# EAGLE board PCB_V1 (EAGLE 9.6.2)
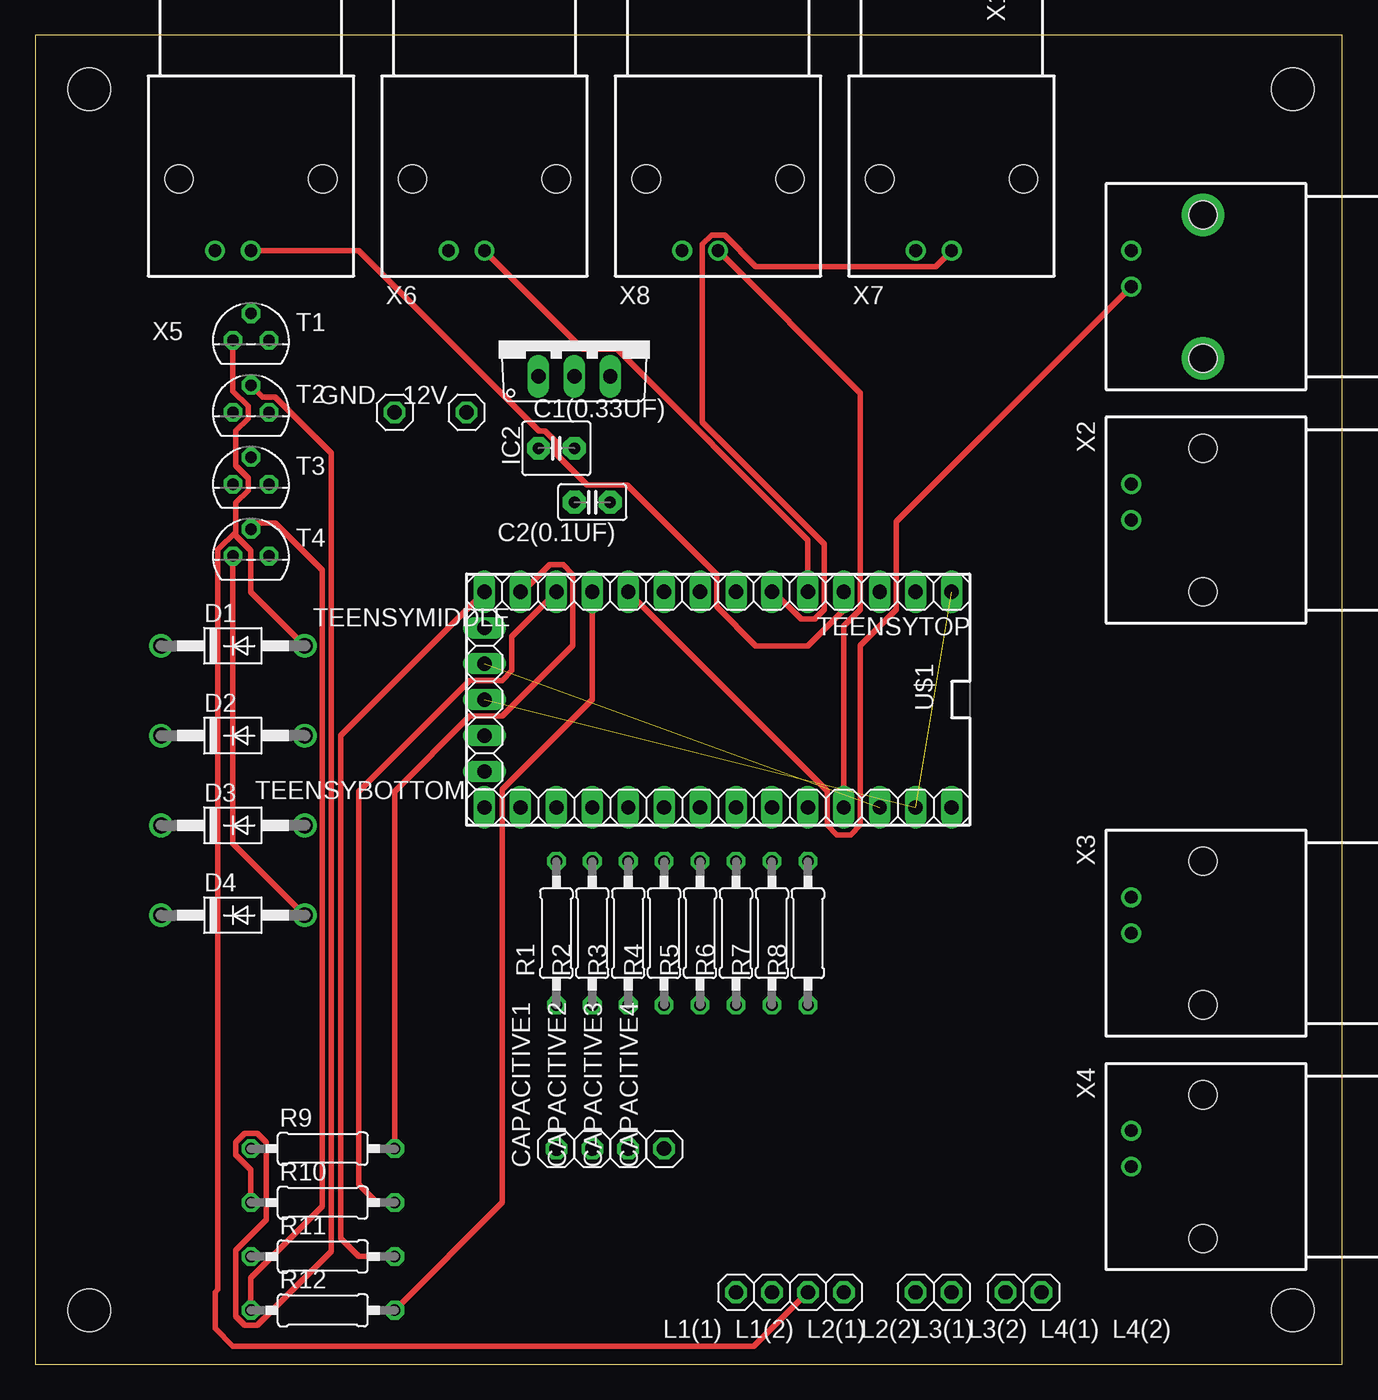
[diagram p0: board, top side]
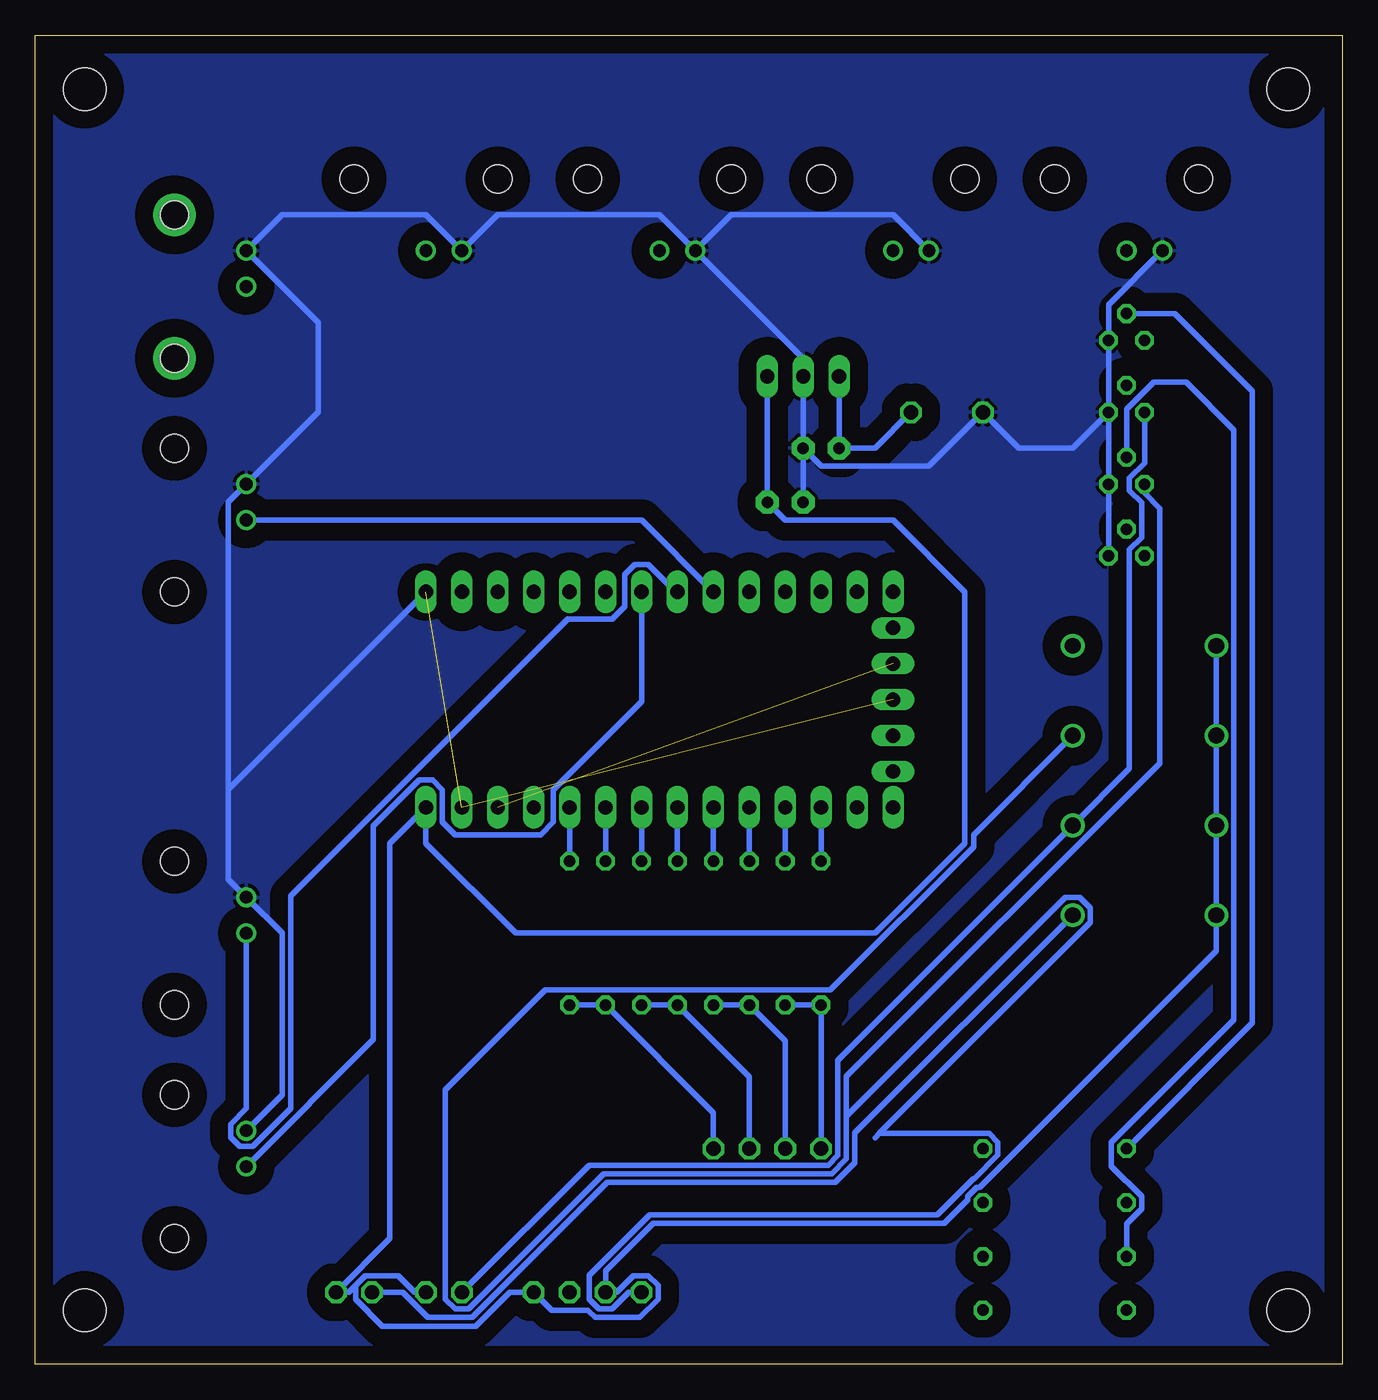
[diagram p1: board, bottom side, seen from below]

Size 92.38 x 93.97 mm. Coordinates in mm from the lower left corner, seen from the top.
Outline: 0,0 92.38,0 92.38,93.97 0,93.97 0,0
Copper layers (1*16): Top 0.035mm / dielectric 1.5mm / Bottom 0.035mm
Design rules "default": minimum track width 6mil, minimum drill 0.35mm, track to track 6mil, track to pad 6mil, pad to pad 6mil, via to via 6mil, smd to smd 6mil, copper to edge 40mil, drill to drill 6mil, minimum pad ring 10mil, minimum via ring 8mil, stop-mask expansion 4mil, vias tented up to drill 0mil, thermal gap 10mil
Net classes: 0 default: width 0.203 mm, drill 0.406 mm, clearance 0.203 mm
Holes 3 mm at 3.81,90.17 88.9,90.17 3.81,3.81 88.9,3.81

## Footprints (pad centres in the part's own frame; a part is rotated, then mirrored left to right if it is on the bottom)
1X01 = drill 1.016 octagon: 1 0,0
C2.5-4 = drill 0.813 pad 1.6 octagon: 1 -1.27,0; 2 1.27,0
C2.5-2 = drill 0.813 pad 1.6 octagon: 1 -1.27,0; 2 1.27,0
DO41-10 = drill 1.118: A 5.08,0; C -5.08,0
TO220V = drill 1.016 long: 1 -2.54,-2.54; 2 0,-2.54; 3 2.54,-2.54
0207/10 = drill 0.813 octagon: 1 -5.08,0; 2 5.08,0
TO92 = drill 0.813 octagon: 1 1.27,0; 2 0,1.905; 3 -1.27,0
1X14 = drill 1.016 long: 1 -16.51,0; 2 -13.97,0; 3 -11.43,0; 4 -8.89,0; 5 -6.35,0; 6 -3.81,0; 7 -1.27,0; 8 1.27,0; 9 3.81,0; 10 6.35,0; 11 8.89,0; 12 11.43,0; 13 13.97,0; 14 16.51,0
1X05 = drill 1.016 long: 1 -5.08,0; 2 -2.54,0; 3 0,0; 4 2.54,0; 5 5.08,0
TEENSY_3.0-3.2&LC_OUTER_ROW = drill 0.965: 0 -7.62,13.97; 1 -7.62,11.43; 2 -7.62,8.89; 3 -7.62,6.35; 3.3V 7.62,11.43; 3.3V1 -2.54,-16.51; 4 -7.62,3.81; 5 -7.62,1.27; 6 -7.62,-1.27; 7 -7.62,-3.81; 8 -7.62,-6.35; 9 -7.62,-8.89; 10 -7.62,-11.43; 11 -7.62,-13.97; 12 -7.62,-16.51; 13 7.62,-16.51; 14/A0 7.62,-13.97; 15/A1 7.62,-11.43; 16/A2 7.62,-8.89; 17/A3 7.62,-6.35; 18/A4 7.62,-3.81; 19/A5 7.62,-1.27; 20/A6 7.62,1.27; 21/A7 7.62,3.81; 22/A8 7.62,6.35; 23/A9 7.62,8.89; AGND 7.62,13.97; GND -7.62,16.51; GND1 0,-16.51; PGM 2.54,-16.51; RESET/DAC 5.08,-16.51; VBAT -5.08,-16.51; VIN 7.62,16.51
AMP_227161 = drill 0.9 pad 1.27: 1 0,-5.08; 2 -2.54,-5.08 | drill 2: P$1 -5.08,0; P$2 5.08,0 | hole 2: -5.08,0; 5.08,0
AMP_227161' = drill 0.9 pad 1.27: 1 0,-5.08; 2 -2.54,-5.08 | hole 2: -5.08,0; 5.08,0

## Placement (x,y rotation side)
12V  [1X01]  30.48,67.31 0 top
C1(0.33UF)  [C2.5-4]  36.83,64.77 0 top
C2(0.1UF)  [C2.5-2]  39.37,60.96 180 top
CAPACITIVE1  [1X01]  36.83,15.24 90 top
CAPACITIVE2  [1X01]  39.37,15.24 90 top
CAPACITIVE3  [1X01]  41.91,15.24 90 top
CAPACITIVE4  [1X01]  44.45,15.24 90 top
D1  1N4004  [DO41-10]  13.97,50.8 0 top
D2  1N4004  [DO41-10]  13.97,44.45 0 top
D3  1N4004  [DO41-10]  13.97,38.1 0 top
D4  1N4004  [DO41-10]  13.97,31.75 0 top
GND  [1X01]  25.4,67.31 0 top
IC2  786TV  [TO220V]  38.1,72.39 0 top
L1(1)  [1X01]  49.53,5.08 0 top
L1(2)  [1X01]  52.07,5.08 0 top
L2(1)  [1X01]  54.61,5.08 0 top
L2(2)  [1X01]  57.15,5.08 0 top
L3(1)  [1X01]  62.23,5.08 0 top
L3(2)  [1X01]  64.77,5.08 0 top
L4(1)  [1X01]  68.58,5.08 0 top
L4(2)  [1X01]  71.12,5.08 0 top
R1  [0207/10]  36.83,30.48 90 top
R2  [0207/10]  39.37,30.48 90 top
R3  [0207/10]  41.91,30.48 90 top
R4  [0207/10]  44.45,30.48 90 top
R5  [0207/10]  46.99,30.48 90 top
R6  [0207/10]  49.53,30.48 90 top
R7  [0207/10]  52.07,30.48 90 top
R8  [0207/10]  54.61,30.48 90 top
R9  [0207/10]  20.32,15.24 0 top
R10  [0207/10]  20.32,11.43 0 top
R11  [0207/10]  20.32,7.62 0 top
R12  [0207/10]  20.32,3.81 0 top
T1  BC337  [TO92]  15.24,72.39 0 top
T2  BC337  [TO92]  15.24,67.31 0 top
T3  BC337  [TO92]  15.24,62.23 0 top
T4  BC337  [TO92]  15.24,57.15 0 top
TEENSYBOTTOM  [1X14]  48.26,39.37 0 top
TEENSYMIDDLE  [1X05]  31.75,46.99 270 top
TEENSYTOP  [1X14]  48.26,54.61 180 top
U$1  TEENSY_LC_OUTER_ROW  [TEENSY_3.0-3.2&LC_OUTER_ROW]  48.26,46.99 270 top
X1  1-227161-0  [AMP_227161]  82.55,76.2 270 top
X2  1-227161-0  [AMP_227161']  82.55,59.69 270 top
X3  1-227161-0  [AMP_227161']  82.55,30.48 270 top
X4  1-227161-0  [AMP_227161']  82.55,13.97 270 top
X5  1-227161-0  [AMP_227161']  15.24,83.82 0 top
X6  1-227161-0  [AMP_227161']  31.75,83.82 0 top
X7  1-227161-0  [AMP_227161']  64.77,83.82 0 top
X8  1-227161-0  [AMP_227161']  48.26,83.82 0 top

## Library data of the parts
12V CAPACITIVE1-CAPACITIVE4 GND L1(1) L1(2) L2(1) L2(2) L3(1) L3(2) L4(1) L4(2) TEENSYBOTTOM TEENSYMIDDLE TEENSYTOP = pinhead
C1(0.33UF) C2(0.1UF) = capacitor-wima
D1-D4 = diode
IC2 = linear
R1-R12 = rcl; SPICEPREFIX: R
T1-T4 = transistor
U$1 = Teensy_3_and_LC_Series_Boards_v1.4
X1 = con-coax_xavi; MF: TYCO ELECTRONICS; MPN: 1-227161; OC_FARNELL: unknown; OC_NEWARK: 33B3200
X2-X8 = con-coax; MF: TYCO ELECTRONICS; MPN: 1-227161; OC_FARNELL: unknown; OC_NEWARK: 33B3200

## Nets
3.3V: U$1.3.3V U$1.3.3V1
5V: C2(0.1UF).1 D1.C D2.C D3.C D4.C IC2.3 L1(2).1 L2(2).1 L3(2).1 L4(2).1 TEENSYBOTTOM.14
26/A12/DAC: U$1.RESET/DAC
GND: U$1.AGND U$1.GND U$1.GND1
N$1: TEENSYTOP.10 X1.1
N$2: TEENSYTOP.4 X5.1
N$3: TEENSYTOP.9 X2.1
N$4: 12V.1 C1(0.33UF).1 IC2.1
N$5: TEENSYTOP.7 X4.1
N$6: TEENSYTOP.8 X3.1
N$7: R1.2 TEENSYBOTTOM.3
N$8: TEENSYTOP.5 X6.1
N$9: R2.2 TEENSYBOTTOM.4
N$10: TEENSYTOP.6 X7.1
N$11: R3.2 TEENSYBOTTOM.5
N$12: R11.2 TEENSYTOP.14
N$13: R4.2 TEENSYBOTTOM.6
N$16: R5.2 TEENSYBOTTOM.7
N$17: R6.2 TEENSYBOTTOM.8
N$18: R7.2 TEENSYBOTTOM.9
N$19: R8.2 TEENSYBOTTOM.10
N$20: CAPACITIVE1.1 R1.1 R2.1
N$21: CAPACITIVE2.1 R3.1 R4.1
N$22: CAPACITIVE3.1 R5.1 R6.1
N$23: CAPACITIVE4.1 R7.1 R8.1
N$24: R11.1 T3.2
N$25: D2.A L1(1).1 T3.3
N$26: TEENSYBOTTOM.11 X8.1
N$27: R9.2 TEENSYTOP.13
N$28: R9.1 T1.2
N$29: D1.A L2(1).1 T1.3
N$30: R10.2 TEENSYTOP.12
N$31: R10.1 T2.2
N$32: D3.A L3(1).1 T2.3
N$34: R12.1 T4.2
N$35: D4.A L4(1).1 T4.3
N$36: R12.2 TEENSYTOP.11
N$37: C1(0.33UF).2 C2(0.1UF).2 GND.1 IC2.2 T1.1 T2.1 T3.1 T4.1 TEENSYTOP.1 X1.2 X2.2 X3.2 X4.2 X5.2 X6.2 X7.2 X8.2
VIN: U$1.VIN

## Tracks (layer width: path | path; a pad name or v marks a point on that pad's centre or on a via)
3.3V  (1 unrouted)
5V
  Bottom 0.406: IC2.3 C2(0.1UF).1 39.37,59.69 31.75,59.69 26.67,54.61 26.67,36.83 33.02,30.48 58.42,30.48 64.77,36.83 TEENSYBOTTOM.14 67.31,36.83 67.31,8.89 L4(2).1 70.23,5.08 69.75,5.56 | D1.C D2.C D3.C D4.C 8.89,29.21 25.6,12.5 25.84,12.5 26.47,11.87 26.47,11.63 28.14,9.96 48.7,9.96 52.07,6.59 L1(2).1 51.28,5.08 50.11,6.25 49.05,6.25 48.36,5.56 48.36,4.6 49.66,3.3 52.81,3.3 53.31,3.81 55.88,3.81 L2(2).1 58.85,5.08 61.24,2.69 67.84,2.69 69.75,4.6 69.75,5.56 | 69.75,5.56 69.06,6.25 66.73,6.25 65.56,5.08 L3(2).1
GND  (2 unrouted)
N$1
  Top 0.406: X1.1 60.86,59.59 60.86,53.36 58.32,50.82 58.32,38.12 57.63,37.44 56.67,37.44 55.98,38.12 55.98,40.54 TEENSYTOP.10
N$2
  Top 0.406: X5.1 22.86,78.74 35.62,65.98 36.06,65.98 36.89,65.14 36.89,64.27 39,62.17 41.85,62.17 48.16,55.86 48.16,53.57 50.93,50.8 54.61,50.8 57.15,53.34 TEENSYTOP.4
N$3
  Bottom 0.406: X2.1 49.53,59.69 TEENSYTOP.9
N$4
  Bottom 0.406: 12V.1 33.02,64.77 C1(0.33UF).1 IC2.1
N$5
  Bottom 0.406: X4.1 68.48,22.96 68.48,38.08 65.25,41.3 64.29,41.3 63.6,40.62 63.6,38.33 62.71,37.44 56.67,37.44 55.78,38.33 55.78,40.62 49.53,46.86 TEENSYTOP.7
N$6
  Bottom 0.406: TEENSYTOP.8 47.12,54.61 49.05,56.54 50.01,56.54 50.7,55.86 50.7,53.57 51.59,52.68 54.74,52.68 74.32,33.1 74.32,18.09 77.01,15.4 77.93,15.4 78.58,16.05 78.58,16.97 77.47,18.08 X3.1
N$7
  Bottom 0.406: TEENSYBOTTOM.3 R1.2
N$8
  Top 0.406: X6.1 38.71,71.78 41.12,71.78 54.61,58.29 TEENSYTOP.5
N$9
  Bottom 0.406: TEENSYBOTTOM.4 R2.2
N$10
  Top 0.406: X7.1 63.66,77.63 50.94,77.63 48.72,79.85 47.8,79.85 47.15,79.2 47.15,66.62 55.78,57.99 55.78,53.36 55.09,52.68 54.13,52.68 52.2,54.61 TEENSYTOP.6
N$11
  Bottom 0.406: TEENSYBOTTOM.5 R3.2
N$12
  Top 0.406: TEENSYTOP.14 21.59,44.45 21.59,8.89 22.86,7.62 R11.2
N$13
  Bottom 0.406: TEENSYBOTTOM.6 R4.2
N$16
  Bottom 0.406: TEENSYBOTTOM.7 R5.2
N$17
  Bottom 0.406: TEENSYBOTTOM.8 R6.2
N$18
  Bottom 0.406: TEENSYBOTTOM.9 R7.2
N$19
  Bottom 0.406: TEENSYBOTTOM.10 R8.2
N$20
  Bottom 0.406: R2.1 R1.1 CAPACITIVE1.1
N$21
  Bottom 0.406: R4.1 R3.1 39.37,22.86 CAPACITIVE2.1
N$22
  Bottom 0.406: CAPACITIVE3.1 41.91,20.32 R5.1 R6.1
N$23
  Bottom 0.406: R8.1 R7.1 44.45,17.78 CAPACITIVE4.1
N$24
  Bottom 0.406: R11.1 15.24,9.92 14.17,10.99 14.17,11.87 16.31,14.01 16.31,15.68 7.64,24.34 7.64,63.5 7.64,63.76 7.64,66.06 11.03,69.45 13.33,69.45 15.24,67.55 T3.2
N$25
  Bottom 0.406: T3.3 13.97,61.58 12.9,60.52 12.9,42.49 35.05,20.34 35.05,17.51 | D2.A 26.06,37.44 26.06,36.58 36.17,26.47 56.32,26.47 63.4,19.39 63.4,4.6 62.71,3.91 61.75,3.91 52.2,13.46 36.09,13.46 35.05,14.5 35.05,17.51 | 32.73,16.31 17.8,31.23 17.8,32.27 18.53,32.99 19.57,32.99 35.05,17.51 | 33.02,16.02 32.73,16.31 | L1(1).1 50.42,5.08 51.59,3.91 52.55,3.91 53.24,4.6 53.24,6.28 48.95,10.57 28.63,10.57 26.09,13.11 26.02,13.11 24.33,14.8 24.33,15.68 24.96,16.31 32.73,16.31
N$26
  Top 0.406: TEENSYBOTTOM.11 57.15,52.2 58.32,53.36 58.32,68.68 X8.1
N$27
  Top 0.406: R9.2 25.4,40.51 30.71,45.82 33,45.82 38,50.82 38,55.86 37.31,56.54 36.35,56.54 34.42,54.61 TEENSYTOP.13
N$28
  Bottom 0.406: R9.1 6.35,24.13 6.35,68.82 11.83,74.3 T1.2
N$29
  Top 0.406: T1.3 13.97,68.82 15.04,67.75 15.04,66.87 14.17,66 14.17,63.53 15.04,62.67 15.04,61.79 14.17,60.92 14.17,58.84 | D1.A 15.24,54.61 15.24,57.55 14.17,58.61 14.17,58.84 | L2(1).1 50.8,1.27 13.97,1.27 12.7,2.54 12.7,5.08 12.9,5.28 12.9,57.59 14.16,58.85 14.17,58.84
N$30
  Top 0.406: TEENSYTOP.12 33.68,51.46 33.68,49.05 33,48.36 30.71,48.36 22.86,40.51 22.86,12.7 24.13,11.43 R10.2
N$31
  Top 0.406: R10.1 15.24,13.73 14.17,14.8 14.17,15.68 14.8,16.31 15.68,16.31 16.31,15.68 16.31,10.2 14.17,8.06 14.17,3.37 14.8,2.74 15.68,2.74 20.9,7.97 20.9,64.42 16.95,68.38 16.08,68.38 T2.2
N$32
  Bottom 0.406: T2.3 13.97,63.74 15.04,62.67 15.04,61.79 14.17,60.92 14.17,58.45 15.04,57.59 15.04,42.11 D3.A 35.66,21.49 35.66,14.76 36.35,14.07 53.24,14.07 L3(1).1
N$34
  Top 0.406: R12.1 15.24,6.11 20.29,11.17 20.29,56.14 16.95,59.49 15.67,59.49 T4.2
N$35
  Top 0.406: T4.3 13.97,36.83 D4.A
  Bottom 0.406: D4.A 34.44,16.36 34.44,14.25 35.84,12.85 51.94,12.85 61.49,3.3 64.64,3.3 66.42,5.08 L4(1).1
N$36
  Top 0.406: R12.2 33.02,11.43 33.02,40.64 39.37,46.99 TEENSYTOP.11
N$37
  Bottom 0.406: C1(0.33UF).2 IC2.2 38.1,71.12 X8.2 | C1(0.33UF).2 36.83,63.5 29.21,63.5 GND.1 22.86,64.77 19.05,64.77 T2.1 | C2(0.1UF).2 C1(0.33UF).2 | X4.2 74.93,19.05 74.93,30.48 X3.2 78.74,34.29 78.74,40.64 | T2.1 T1.1 16.51,74.93 X5.2 | T2.1 T3.1 T4.1 | 78.74,40.64 78.74,60.96 X2.2 72.39,67.31 72.39,73.66 X1.2 74.93,81.28 64.77,81.28 X7.2 59.69,81.28 48.26,81.28 X8.2 | X8.2 43.18,81.28 31.75,81.28 X6.2 | TEENSYTOP.1 78.74,40.64
  pour Bottom (isolate 1.27): 0,95.25 92.71,95.25 92.71,-1.27 -1.27,-1.27 -1.27,93.98